# EAGLE board PCB_NixieClock (EAGLE 9.7.0)
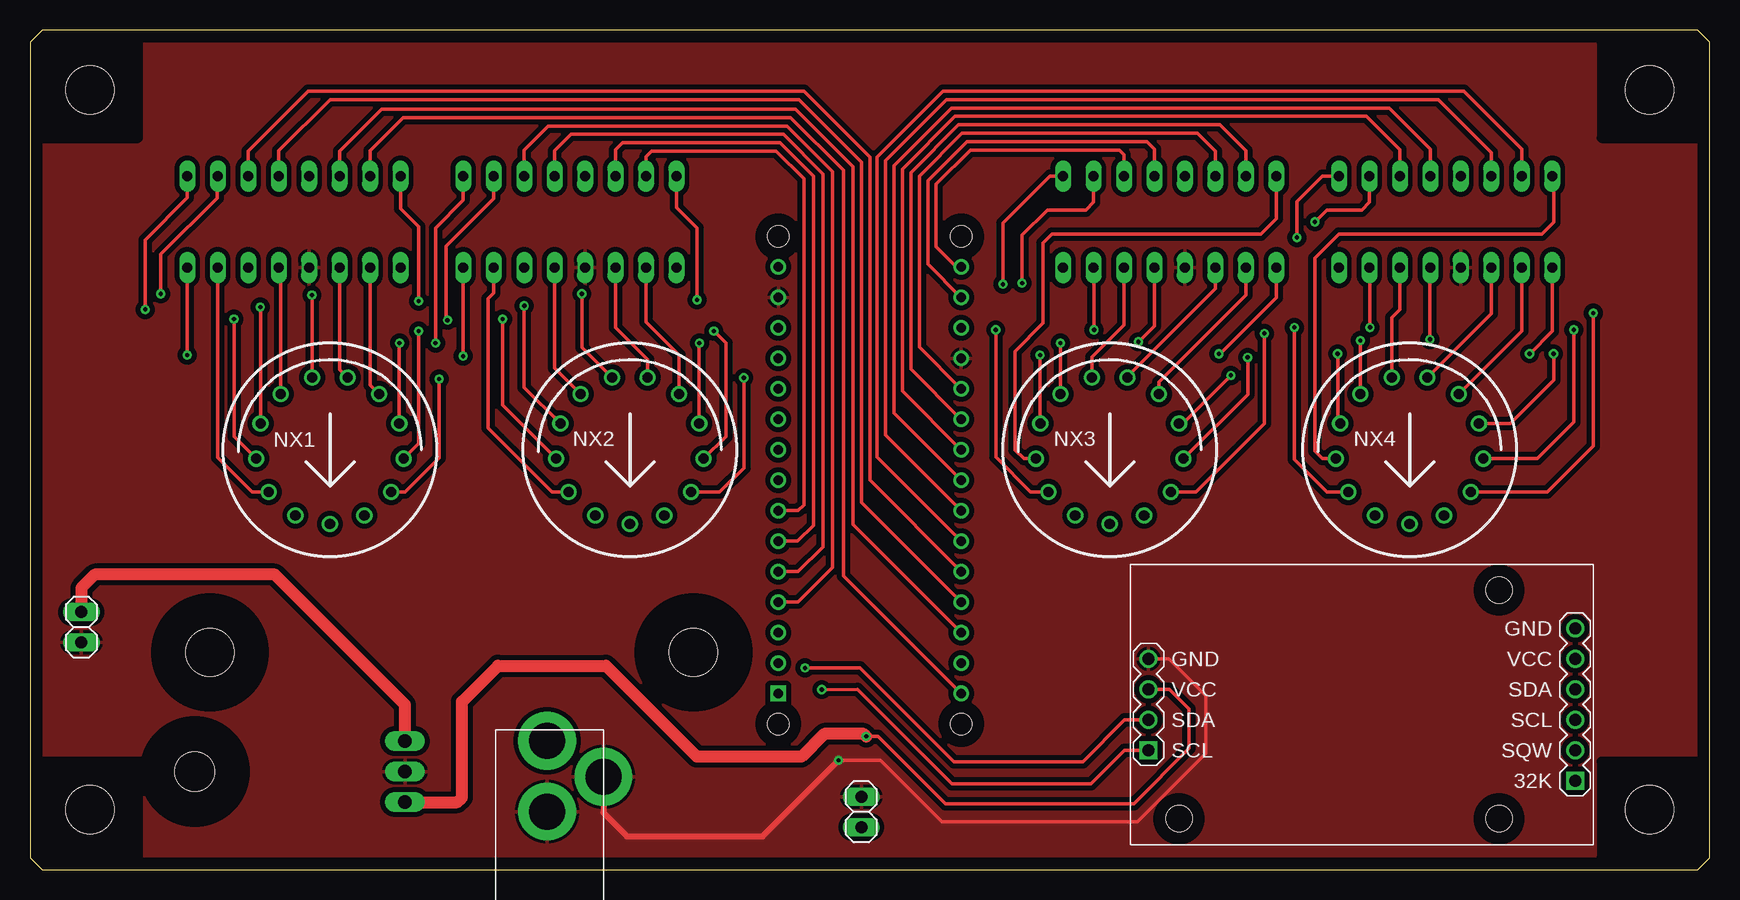
[diagram p0: board, top side]
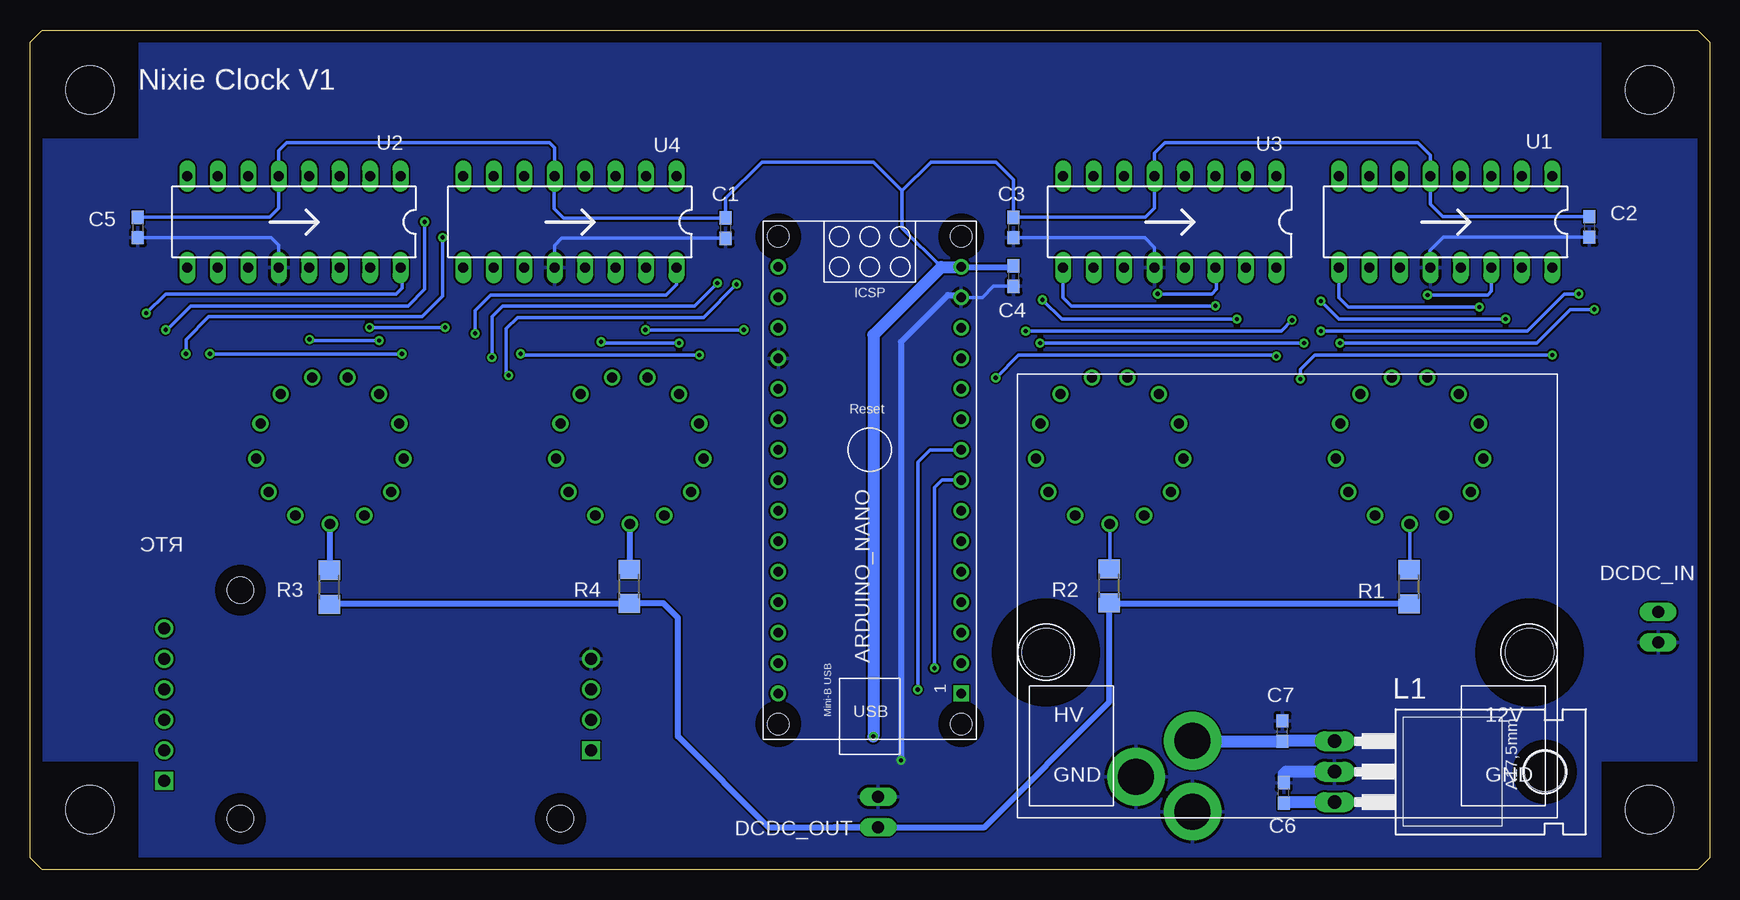
[diagram p1: board, bottom side, seen from below]

Size 140 x 70 mm. Coordinates in mm from the lower left corner, seen from the top.
Outline: 0,69 0,1 1,0 139,0 140,1 140,69 139,70 1,70 0,69
Copper layers (1*16): Top 0.035mm / dielectric 1.5mm / Bottom 0.035mm
Design rules "Fusion Electronics Design Rules": minimum track width 6mil, minimum drill 0.35mm, track to track 6mil, track to pad 6mil, pad to pad 6mil, via to via 6mil, smd to smd 6mil, copper to edge 40mil, drill to drill 6mil, minimum pad ring 10mil, minimum via ring 8mil, stop-mask expansion 4mil, vias tented up to drill 0mil, thermal gap 10mil
Net classes: 0 default: clearance 0.3 mm; 1 HV: clearance 1 mm to class 0; 2 GND: clearance 0.5 mm to class 0, clearance 1 mm to class 1
Holes 4 mm at 5,65 135,65 135,5 5,5 15,18.1 55.3,18.1
tRestrict: area 11,14.1 to 19,22.1; area 51.3,14.1 to 59.3,22.1; area 1,61 to 9,69; area 1,1 to 9,9; area 131,1 to 139,9; area 131,61 to 139,69
bRestrict: area 11,14.1 to 19,22.1; area 51.3,14.1 to 59.3,22.1; area 1,61 to 9,69; area 1,1 to 9,9; area 131,1 to 139,9; area 131,61 to 139,69

## Footprints (pad centres in the part's own frame; a part is rotated, then mirrored left to right if it is on the bottom)
ARDUINO_NANO = drill 0.8 square: 1 -20.32,-7.62 | drill 0.8: 2 -17.78,-7.62; 3 -15.24,-7.62; 4 -12.7,-7.62; 5 -10.16,-7.62; 6 -7.62,-7.62; 7 -5.08,-7.62; 8 -2.54,-7.62; 9 0,-7.62; 10 2.54,-7.62; 11 5.08,-7.62; 12 7.62,-7.62; 13 10.16,-7.62; 14 12.7,-7.62; 15 15.24,-7.62; 16 15.24,7.62; 17 12.7,7.62; 18 10.16,7.62; 19 7.62,7.62; 20 5.08,7.62; 21 2.54,7.62; 22 0,7.62; 23 -2.54,7.62; 24 -5.08,7.62; 25 -7.62,7.62; 26 -10.16,7.62; 27 -12.7,7.62; 28 -15.24,7.62; 29 -17.78,7.62; 30 -20.32,7.62 | hole 1.778: -22.86,-7.62; -22.86,7.62; 17.78,7.62; 17.78,-7.62
C0603 = smd 1.1 x 1: 1 -0.85,0; 2 0.85,0
PJ-102A = drill 3 pad 4.8: RING 0.1,-3.39; RING_SW -4.6,-6.29; TIP 0.1,-9.29
1X02 = drill 1.016 long: 1 -1.27,0; 2 1.27,0
TO220 = drill 1.118 long: 1 -2.54,-6.35; 2 0,-6.35; 3 2.54,-6.35 | hole 3.302: 0,11.176
IN-14 = drill 0.84: 0 5.094,-3.516; 1 -5.094,-3.516; 2 -6.145,-0.746; 3 -5.788,2.195; 4 -4.105,4.633; 5 -1.481,6.01; 6 1.481,6.01; 7 4.105,4.633; 8 5.788,2.195; 9 6.145,-0.746; A 0,-6.19; LHDP 2.877,-5.481; RHDP -2.877,-5.481
R1206 = smd 1.6 x 1.803: 1 -1.422,0; 2 1.422,0
RTC-DS3231-AT24C32 = drill 1 square: J1.1 -17.78,6.35; J2.1 17.78,3.81 | drill 1: J1.2 -17.78,3.81; J1.3 -17.78,1.27; J1.4 -17.78,-1.27; J1.5 -17.78,-3.81; J1.6 -17.78,-6.35; J2.2 17.78,1.27; J2.3 17.78,-1.27; J2.4 17.78,-3.81 | hole 2.2: -11.43,-9.525; -11.43,9.525; 15.24,9.525
DIL16 = drill 0.813 long: 1 -8.89,-3.81; 2 -6.35,-3.81; 3 -3.81,-3.81; 4 -1.27,-3.81; 5 1.27,-3.81; 6 3.81,-3.81; 7 6.35,-3.81; 8 8.89,-3.81; 9 8.89,3.81; 10 6.35,3.81; 11 3.81,3.81; 12 1.27,3.81; 13 -1.27,3.81; 14 -3.81,3.81; 15 -6.35,3.81; 16 -8.89,3.81

## Placement (x,y rotation side)
ARDUINO_NANO  [ARDUINO_NANO]  70,35 90 bottom
C1  100n  [C0603]  82.02,53.48 270 bottom
C2  100n  [C0603]  10.02,53.58 270 bottom
C3  100n  [C0603]  58.02,53.53 270 bottom
C4  100n  [C0603]  58.02,49.48 270 bottom
C5  100n  [C0603]  131.02,53.53 270 bottom
C6  10u  [C0603]  35.5,6.4 90 bottom
C7  10u  [C0603]  35.6,11.54 90 bottom
D1  DCDC_NIXIE  [NIXIE_DCDC]  57.7,4.3 0 bottom
DC_JACK  2.1MMJACKTHM  [PJ-102A]  43.2,1.44 180 top
DCDC_IN  [1X02]  4.28,20.2 270 top
DCDC_OUT  [1X02]  69.3,4.8 270 top
L1  L7805_5V  [TO220]  24.91,8.16 270 bottom
NX1  IN-14  [IN-14]  25,35 0 top
NX2  IN-14  [IN-14]  50,35 0 top
NX3  IN-14  [IN-14]  115,35 0 top
NX4  IN-14  [IN-14]  90,35 0 top
R1  10k  [R1206]  25.05,23.57 270 bottom
R2  10k  [R1206]  50.05,23.65 270 bottom
R3  10k  [R1206]  115.05,23.53 270 bottom
R4  10k  [R1206]  90.05,23.61 270 bottom
RTC  RTC-DS3231-AT24C32  [RTC-DS3231-AT24C32]  111.02,13.76 180 top
U1  K155ID1  [DIL16]  22,54 180 bottom
U2  K155ID1  [DIL16]  118,54 180 bottom
U3  K155ID1  [DIL16]  45,54 180 bottom
U4  K155ID1  [DIL16]  95,54 180 bottom

## Library data of the parts
ARDUINO_NANO = ArduinoNanoV30
C1-C7 = rcl; SPICEPREFIX: C
D1 = Flo
DC_JACK = adafruit
DCDC_IN DCDC_OUT = pinhead
L1 U1-U4 = K155ID1
NX1-NX4 = russian-nixies
R1-R4 = rcl; SPICEPREFIX: R
RTC = diy-modules

## Nets
5V: ARDUINO_NANO.12
+5V: ARDUINO_NANO.15 C1.1 C2.1 C3.1 C4.1 C5.1 C6.1 L1.3 RTC.J2.3 U1.5 U2.5 U3.5 U4.5
+12V: C7.1 DC_JACK.TIP DCDC_IN.1 L1.1
+170V [HV]: DCDC_OUT.2 R1.2 R2.2 R3.2 R4.2
A1: ARDUINO_NANO.26 U1.3
A2: ARDUINO_NANO.4 U3.3
A3: ARDUINO_NANO.22 U2.3
A4: ARDUINO_NANO.16 U4.3
B1: ARDUINO_NANO.28 U1.6
B2: ARDUINO_NANO.6 U3.6
B3: ARDUINO_NANO.24 U2.6
B4: ARDUINO_NANO.20 U4.6
C1: ARDUINO_NANO.30 U1.7
C2: ARDUINO_NANO.7 U3.7
C3: ARDUINO_NANO.25 U2.7
C4: ARDUINO_NANO.21 U4.7
D1: ARDUINO_NANO.27 U1.4
D2: ARDUINO_NANO.5 U3.4
D3: ARDUINO_NANO.23 U2.4
D4: ARDUINO_NANO.17 U4.4
GND [GND]: ARDUINO_NANO.14 ARDUINO_NANO.19 C1.2 C2.2 C3.2 C4.2 C5.2 C6.2 C7.2 DC_JACK.RING DC_JACK.RING_SW DCDC_IN.2 DCDC_OUT.1 L1.2 RTC.J2.4 U1.12 U2.12 U3.12 U4.12
GND.1: RTC.J1.6
N$1: NX1.1 U1.15
N$2: NX1.2 U1.8
N$3: NX1.3 U1.9
N$4: NX1.4 U1.13
N$5: NX1.5 U1.14
N$6: NX1.6 U1.11
N$7: NX1.7 U1.10
N$8: NX1.8 U1.1
N$9: NX1.9 U1.2
N$10: NX3.1 U2.15
N$11: NX3.2 U2.8
N$12: NX3.3 U2.9
N$13: NX3.4 U2.13
N$14: NX3.5 U2.14
N$15: NX3.6 U2.11
N$16: NX3.7 U2.10
N$17: NX3.8 U2.1
N$18: NX3.9 U2.2
N$19: NX2.1 U3.15
N$20: NX2.2 U3.8
N$21: NX2.3 U3.9
N$22: NX2.4 U3.13
N$23: NX2.5 U3.14
N$24: NX2.6 U3.11
N$25: NX2.7 U3.10
N$26: NX2.8 U3.1
N$27: NX2.9 U3.2
N$28: NX4.1 U4.15
N$29: NX4.2 U4.8
N$30: NX4.3 U4.9
N$31: NX4.4 U4.13
N$32: NX4.5 U4.14
N$33: NX4.6 U4.11
N$34: NX4.7 U4.10
N$35: NX4.8 U4.1
N$36: NX4.9 U4.2
N$37: NX3.A R3.1
N$38: NX1.A R1.1
N$39: NX2.A R2.1
N$40: NX4.A R4.1
NX1_0: NX1.0 U1.16
NX2_0: NX2.0 U3.16
NX3_0: NX3.0 U2.16
NX4_0: NX4.0 U4.16
SCL: ARDUINO_NANO.9 RTC.J2.1
SDA: ARDUINO_NANO.8 RTC.J2.2
VCC.1: RTC.J1.5

## Tracks (layer width: path | path; a pad name or v marks a point on that pad's centre or on a via)
+5V  (via drill 0.35)
  Top 0.305: v69.7,11.1 70.7,11.1 76.3,5.5 92,5.5 96.6,10.1 96.6,13.4 94.97,15.03 RTC.J2.3
  Top 1.016: L1.3 35.62,5.62 36,6 36,14 39,17 48,17 55.6,9.4 64.3,9.4 66.2,11.3 69.5,11.3 v69.7,11.1
  Bottom 0.305: 35.43,5.62 C6.1 | C2.1 22.23,54.43 23.27,55.47 U1.5 23.27,59.57 24.3,60.6 45.4,60.6 46.27,59.73 U3.5 46.27,55.13 47.02,54.38 C3.1 58.02,57.52 59.5,59 64.9,59 67.3,56.6 | 58.11,50.24 C4.1 | 67.3,56.6 67.3,53.5 64.04,50.24 | 67.3,56.6 69.7,59 79,59 82.02,55.98 C1.1 95.53,54.33 96.3,55.1 96.3,57.78 U4.5 96.27,60.17 96.7,60.6 118.6,60.6 119.27,59.93 U2.5 119.27,55.13 120.02,54.38 C5.1
  Bottom 0.508: ARDUINO_NANO.15 58.11,50.24
  Bottom 1.016: L1.3 35.43,5.62 | ARDUINO_NANO.15 64.04,50.24 69.7,44.58 v69.7,11.1
+12V
  Top 1.016: L1.1 31.26,13.74 20.4,24.6 5.41,24.6 4.28,23.47 DCDC_IN.1
  Bottom 0.305: C7.1 35.04,10.69 35,10.73
  Bottom 1.016: L1.1 31.29,10.73 35,10.73 | DC_JACK.TIP 43.06,10.69 C7.1
+170V
  Bottom 0.508: R1.2 49.97,22.15 R2.2 50.05,13.95 60.5,3.5 73,3.5 | R3.2 114.97,22.19 R4.2 87.19,22.19 86,21 86,11.1 78.4,3.5 73,3.5 | DCDC_OUT.2 72.97,3.53 73,3.5
A1
  Top 0.305: ARDUINO_NANO.26 70,32.46 70,59.4 64.5,64.9 23.2,64.9 18.19,59.89 U1.3
A2
  Top 0.305: ARDUINO_NANO.4 64,22.3 66.9,25.2 66.9,58.2 63.1,62 43.2,62 41.19,59.99 U3.3
A3
  Top 0.305: ARDUINO_NANO.22 72.72,39.9 72.72,58.4 77.12,62.8 111.4,62.8 114.19,60.01 U2.3
A4
  Top 0.305: ARDUINO_NANO.16 77.5,50.12 77.37,50.12 75.54,51.95 75.54,57.14 78.38,59.99 90.8,59.99 91.19,59.6 U4.3
B1
  Top 0.305: ARDUINO_NANO.28 68.6,28.78 68.6,58.6 63.8,63.4 29.3,63.4 25.8,59.9 25.8,56.82 U1.6
B2
  Top 0.305: ARDUINO_NANO.6 63.98,27.38 65.3,28.7 65.3,57.8 62.5,60.6 49.4,60.6 48.81,60.01 U3.6
B3
  Top 0.305: ARDUINO_NANO.24 71.31,36.23 71.31,59.1 76.41,64.2 117.4,64.2 121.81,59.79 U2.6
B4
  Top 0.305: ARDUINO_NANO.20 74.13,43.57 74.13,57.83 77.69,61.4 97.31,61.4 98.81,59.89 U4.6
C1
  Top 0.305: ARDUINO_NANO.30 67.8,24.5 67.8,58.3 63.4,62.7 31.1,62.7 28.35,59.95 U1.7
C2
  Top 0.305: ARDUINO_NANO.7 64.02,29.92 64.5,30.4 64.5,57.6 62.2,59.9 51.8,59.9 51.35,59.45 U3.7
C3
  Top 0.305: ARDUINO_NANO.25 70.61,34.4 70.61,59.41 76.1,64.9 119.5,64.9 124.35,60.05 U2.7
C4
  Top 0.305: ARDUINO_NANO.21 73.42,41.74 73.42,58.12 77.4,62.1 99.2,62.1 101.35,59.95 U4.7
D1
  Top 0.305: ARDUINO_NANO.27 69.3,30.62 69.3,59 64.1,64.2 25,64.2 20.73,59.93 U1.4
D2
  Top 0.305: ARDUINO_NANO.5 64.04,24.84 66.1,26.9 66.1,58 62.8,61.3 45.1,61.3 43.73,59.93 U3.4
D3
  Top 0.305: ARDUINO_NANO.23 72.01,38.07 72.01,58.7 76.81,63.49 113.3,63.49 116.73,60.06 U2.4
D4
  Top 0.305: ARDUINO_NANO.17 74.83,50.49 74.83,57.43 78.09,60.69 93.1,60.69 93.73,60.06 U4.4
GND  (via drill 0.35)
  Top 0.305: v67.4,9.1 70.9,9.1 76,4 92.3,4 98,9.7 98,14.5 94.93,17.57 RTC.J2.4
  Top 0.508: DC_JACK.RING_SW 47.8,4.73 49.77,2.77 61.06,2.77 v67.4,9.1
  Bottom 0.305: C2.2 22.17,52.73 23.3,51.6 23.3,49.22 U1.12 | U3.12 46.27,51.87 47.08,52.68 C3.2 | C4.2 59.67,48.63 60.6,47.7 ARDUINO_NANO.14 | C1.2 95.67,52.63 96.27,52.03 U4.12 | C5.2 119.88,52.68 119.27,52.07 U2.12
  Bottom 0.508: v67.4,9.1 67.4,44 63.5,47.9 62.58,47.9 ARDUINO_NANO.14
  Bottom 1.016: C6.2 35.5,7.95 35.29,8.16 L1.2
  pour Bottom: 0,0 140,0 140,70 0,70
  pour Top (isolate 0.406): 0,0 140,0 140,70 0,70
N$1
  Top 0.305: NX1.1 18.52,31.48 15.65,34.35 U1.15
N$2  (via drill 0.35)
  Top 0.305: NX1.2 17,36.11 v17,45.9 | v32.4,47.4 32.4,53.6 30.89,55.11 U1.8
  Bottom 0.305: v17,45.9 30.9,45.9 v32.4,47.4
N$3  (via drill 0.35)
  Top 0.305: NX1.3 19.21,46.89 v19.2,46.9
  Bottom 0.305: v19.2,46.9 30.1,46.9 30.9,47.7 U1.9
N$4
  Top 0.305: NX1.4 20.89,50.02 U1.13
N$5  (via drill 0.35)
  Top 0.305: NX1.5 23.52,47.88 v23.5,47.9
  Bottom 0.305: v23.5,47.9 18.5,47.9 18.19,48.21 U1.14
N$6
  Top 0.305: NX1.6 25.81,41.68 U1.11
N$7
  Top 0.305: NX1.7 28.35,40.39 U1.10
N$8  (via drill 0.35)
  Top 0.305: NX1.8 30.79,43.89 v30.8,43.9 | v9.6,46.7 9.6,52.5 13.11,56.01 U1.1
  Bottom 0.305: v30.8,43.9 14.4,43.9 11.6,46.7 v9.6,46.7
N$9  (via drill 0.35)
  Top 0.305: NX1.9 32.4,35.51 v32.4,44.9 | v10.9,48 10.9,51.3 15.6,56 15.6,57.76 U1.2
  Bottom 0.305: v32.4,44.9 15.2,44.9 12.1,48 v10.9,48
N$10  (via drill 0.35)
  Top 0.305: NX3.1 108.12,31.48 105.4,34.2 v105.4,45.2 | v111.7,45.2 111.7,50.14 U2.15
  Bottom 0.305: v111.7,45.2 v105.4,45.2
N$11
  Top 0.305: NX3.2 107.75,34.25 107.1,34.9 107.1,44 107.1,44.3 107.1,51 109.1,53 126,53 127,54 127,57.7 U2.8
N$12  (via drill 0.35)
  Top 0.305: NX3.3 109,37.41 v109,43 | v125,43 126.89,44.89 U2.9
  Bottom 0.305: v109,43 v125,43
N$13  (via drill 0.35)
  Top 0.305: NX3.4 v110.89,44.09 v110.9,44.1 | v116.7,44.2 116.7,50.16 U2.13
  Bottom 0.305: v116.7,44.2 116.6,44.1 v110.9,44.1
N$14
  Top 0.305: NX3.5 113.52,46.02 114.2,46.7 U2.14
N$15
  Top 0.305: NX3.6 121.81,46.34 U2.11
N$16
  Top 0.305: NX3.7 124.35,44.88 U2.10
N$17  (via drill 0.35)
  Top 0.305: NX3.8 123.39,37.2 127,40.8 v127,43 | v105.6,52.7 105.6,55.7 107.71,57.81 U2.1
  Bottom 0.305: v127,43 127,44.2 125.1,46.1 107.3,46.1 105.6,47.8 v105.6,52.7
N$18  (via drill 0.35)
  Top 0.305: NX3.9 125.65,34.25 128.7,37.3 v128.7,45 | v107.1,54 108.1,55 111,55 111.65,55.65 U2.2
  Bottom 0.305: v128.7,45 128.6,45 126.6,47 108.5,47 107.1,48.4 v107.1,54
N$19
  Top 0.305: NX2.1 43.52,31.48 38.2,36.8 38.2,47.6 38.65,48.05 U3.15
N$20  (via drill 0.35)
  Top 0.305: NX2.2 39.4,38.71 v39.4,45.9 | v55.6,47.5 55.6,53.47 53.89,55.18 U3.8
  Bottom 0.305: v55.6,47.5 54,45.9 v39.4,45.9
N$21  (via drill 0.35)
  Top 0.305: NX2.3 41.2,40.21 v41.2,47
  Bottom 0.305: v41.2,47 53.2,47 53.89,47.69 U3.9
N$22
  Top 0.305: NX2.4 43.73,41.8 U3.13
N$23  (via drill 0.35)
  Top 0.305: NX2.5 46,43.53 v46,48
  Bottom 0.305: v46,48 41.5,48 41.1,48.4 41.1,50.1 U3.14
N$24
  Top 0.305: NX2.6 51.48,42.52 48.81,45.19 U3.11
N$25
  Top 0.305: U3.10 51.35,45.65 54.1,42.9 NX2.7
N$26  (via drill 0.35)
  Top 0.305: NX2.8 55.79,43.91 v55.8,43.9 | v33.8,43.9 33.8,53.5 36.11,55.81 U3.1
  Bottom 0.305: v55.8,43.9 v33.8,43.9
N$27  (via drill 0.35)
  Top 0.305: NX2.9 58,36.11 58,43.9 v57,44.9 | v34.8,45.8 34.7,45.9 34.7,52 38.65,55.95 U3.2
  Bottom 0.305: v57,44.9 35.7,44.9 v34.8,45.8
N$28  (via drill 0.35)
  Top 0.305: NX4.1 83.42,31.48 80.5,34.4 v80.5,45 | v88.7,45 88.7,50.14 U4.15
  Bottom 0.305: v88.7,45 v80.5,45
N$29
  Top 0.305: NX4.2 82.85,34.25 82.1,35 82.1,43.2 84.45,45.55 84.45,52.25 85.2,53 102.6,53 103.89,54.29 U4.8
N$30  (via drill 0.35)
  Top 0.305: NX4.3 v84.2,42.9 | U4.9 103.89,47.69 99.2,43 v99.1,43
  Bottom 0.305: v99.1,43 99,42.9 v84.2,42.9
N$31  (via drill 0.35)
  Top 0.305: NX4.4 v85.89,43.9 v85.9,43.9 | v92.4,44 93.73,45.33 U4.13
  Bottom 0.305: v92.4,44 92.3,43.9 v85.9,43.9
N$32
  Top 0.305: NX4.5 88.52,42.72 91.19,45.39 U4.14
N$33
  Top 0.305: NX4.6 91.48,41.11 98.81,48.44 U4.11
N$34
  Top 0.305: NX4.7 94.11,40.63 101.35,47.88 U4.10
N$35  (via drill 0.35)
  Top 0.305: v100.1,41.2 96.09,37.2 NX4.8 | v81.1,48.8 81.1,53.9 85.01,57.81 U4.1
  Bottom 0.305: v100.1,41.2 100.3,41.4 100.3,45.1 99.37,46.03 83.87,46.03 v81.1,48.8
N$36  (via drill 0.35)
  Top 0.305: NX4.9 101.5,39.61 v101.5,42.7 | v82.7,48.9 82.7,52.9 84.8,55 88,55 88.65,55.65 U4.2
  Bottom 0.305: v101.5,42.7 101.5,46.1 100.6,47 84.6,47 v82.7,48.9
N$37
  Bottom 0.508: R3.1 115,25 NX3.A
N$38
  Bottom 0.305: NX1.A 25,25.04 R1.1
N$39
  Bottom 0.305: NX2.A 50,25.12 R2.1
N$40
  Bottom 0.508: R4.1 90,25.08 NX4.A
NX1_0  (via drill 0.35)
  Top 0.305: NX1.0 31.28,31.48 34.1,34.3 v34.1,40.9 | v13.1,42.9 U1.16
  Bottom 0.305: v34.1,40.9 34.1,41.7 32.9,42.9 v13.1,42.9
NX2_0  (via drill 0.35)
  Top 0.305: NX2.0 57.48,31.48 59.5,33.5 v59.5,41 | U3.16 v36.1,42.8
  Bottom 0.305: v59.5,41 57.6,42.9 54,42.9 36.2,42.9 v36.1,42.8
NX3_0  (via drill 0.35)
  Top 0.305: NX3.0 126.48,31.48 130.3,35.3 v130.3,46.4
  Bottom 0.305: v130.3,46.4 128.7,48 109.5,48 109,48.5 109,50.08 U2.16
NX4_0  (via drill 0.35)
  Top 0.305: NX4.0 97.18,31.48 102.9,37.2 v102.9,44.7
  Bottom 0.305: v102.9,44.7 102.9,46.6 101.6,47.9 87,47.9 86.11,48.79 U4.16
SCL  (via drill 0.35)
  Top 0.305: v66,15 69,15 76.85,7.15 88.44,7.15 91.24,9.95 RTC.J2.1
  Bottom 0.305: v66,15 66,34 65,35 ARDUINO_NANO.9
SDA  (via drill 0.35)
  Top 0.305: RTC.J2.2 91.24,12.49 87.75,9 77,9 69.2,16.8 v64.6,16.8
  Bottom 0.305: ARDUINO_NANO.8 64,32.46 64.6,31.86 v64.6,16.8

## Text on the board
bNames: Nixie Clock V1 | USB